# Altium PCB test.PcbDoc
Units mm, origin at the board's own origin, x right, y up, seen from the top; angles counter-clockwise.
Board outline 145 x 100 mm, 2 copper layers (Top Layer, Bottom Layer); 77 components, 97 nets, 327 pads, 0 vias.
Unrouted connection lines stored in the file: 180.
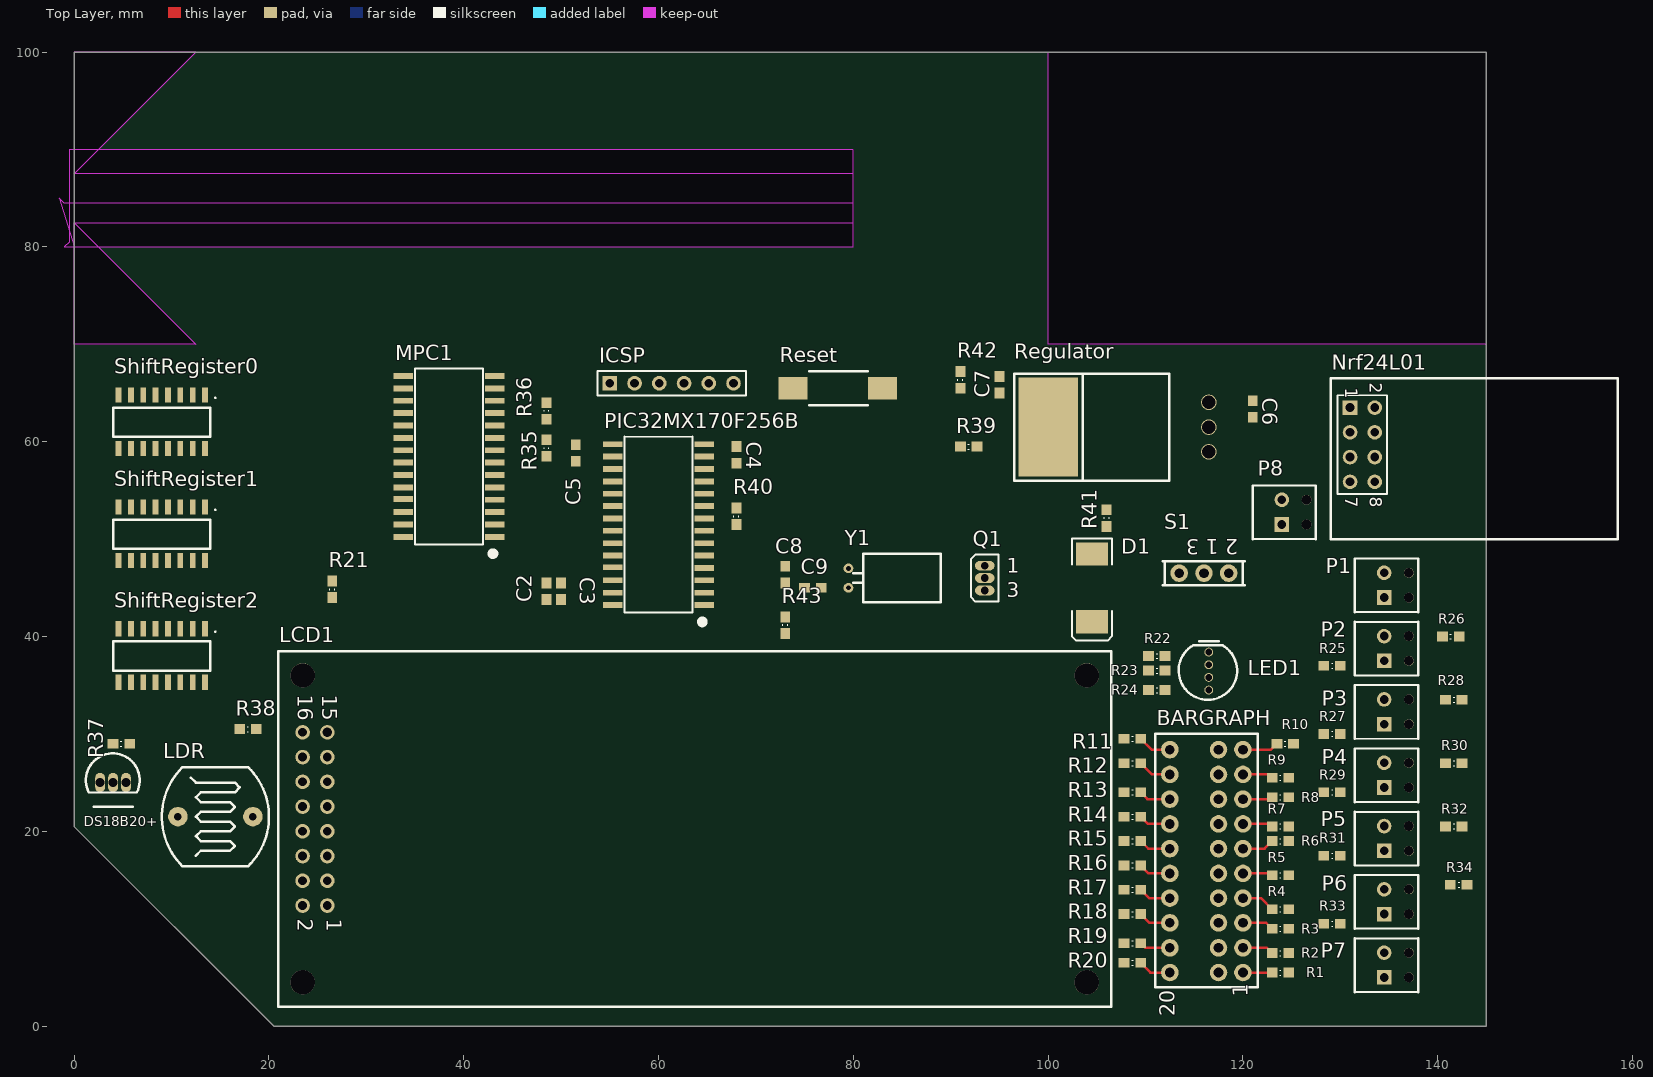
[diagram p0: Top Layer view]
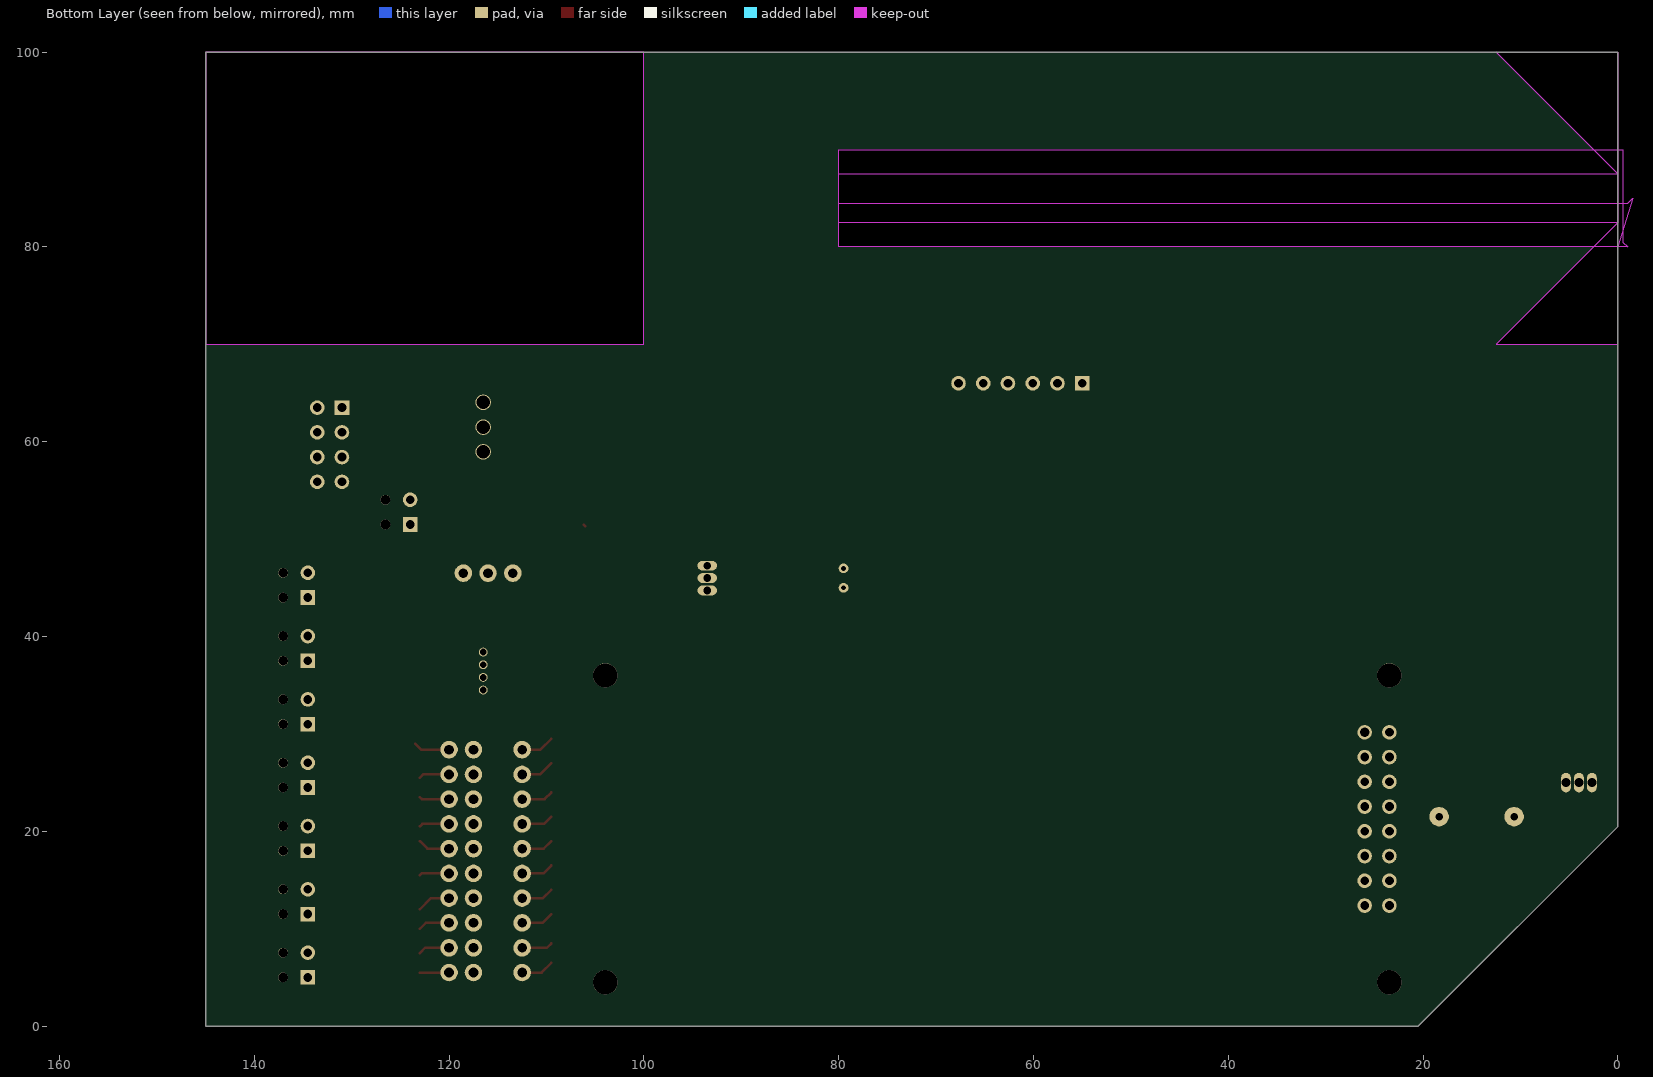
[diagram p1: Bottom Layer view, seen from below]

## Layer stack, top to bottom
Top Solder: solder mask 0.0102, Solder Resist, Dk 3.5
Top Layer: signal copper 0.0356
Dielectric 1: dielectric 0.32, FR-4, Dk 4.8
Bottom Layer: signal copper 0.0356
Bottom Solder: solder mask 0.0102, Solder Resist, Dk 3.5

## Board outline
20.5,0 145,0 145,100 0,100 0,20.5
cut-out: 80,80 80,90 -0.5,90 -0.5,80.5 -1,80
cut-out: 0,80 80,80 80,84.5 -1,84.5 -1.5,85
cut-out: 0,87.5 0,82.5 80,82.5 80,87.5
cut-out: 145,70 100,70 100,100 145,100
cut-out: 0,82.5 12.5,70 0,70
cut-out: 0,87.5 12.5,100 0,100

## Design rules (kind name [scope] priority, off if disabled: settings)
Clearance [All] p1: gap=0.2
PolygonConnect [All] p1: connectstyle=Relief reliefconductorwidth=0.254 reliefentries=4 polygonreliefangle="90 Angle" airgapwidth=0.254
RoutingVias [All] p1: holewidth=0.711 width=1.27 viastyle="Through Hole" minholewidth=0.711 minwidth=1.27 maxholewidth=0.711 maxwidth=1.27
SolderMaskExpansion [All] p1: expansion=0.102
UnpouredPolygon [All] p1: allowunpoured=FALSE
Width [All] p1: maxlimit=10 minlimit=0.2 preferedwidth=0.254
29 further rules are at their usual default settings.

## Classes and differential pairs
net class SPI[0..3]: SPI0 SPI1 SPI2 SPI3
net class RD[0..2]: RD0 RD1 RD2
net class LED[0..2]: LED0 LED1 LED2
net class LCD[0..10]: LCD0 LCD1 LCD2 LCD3 LCD4 LCD5 LCD6 LCD7 LCD8 LCD9 LCD10
net class I2C[0..1]: I2C0 I2C1
net class ELECTRODE[0..4]: ELECTRODE0 ELECTRODE1 ELECTRODE2 ELECTRODE3 ELECTRODE4
component class TempSensor: DS18B20+ R37
component class SoilMoisture: P7
component class Pump: P1 PUMP Q1 R43
component class Power: C6 C7 P8 R42 Regulator S1
component class PIC32MX170F256B: C2 C3 C4 C5 C8 C9 ICSP PIC32MX170F256B R39 R40 Reset Y1
component class ModRadio: Nrf24L01
component class MCP23017: MPC1 R35 R36
component class LumSensor: LDR R38
component class "Level Sensor": P2 P3 P4 P5 P6 R25 R26 R27 R28 R29 R30 R31 R32 R33 R34
component class LedAlert: LED1 R22 R23 R24
component class "Ecran LCD": LCD1 R21
component class BarGraph: BARGRAPH R1 R2 R3 R4 R5 R6 R7 R8 R9 R10 R11 R12 R13 R14 R15 R16 R17 R18 R19 R20 ShiftRegister0 ShiftRegister1 ShiftRegister2

## Components (designator, comment, footprint, x,y, rotation, side; value= is the part's Value field where it differs from the comment)
BARGRAPH "BargraphRG" BargraphRG 117.5,5.5 r90 top
C2 "0.1uF" C0603 48.5,45.5 r270 top
C3 "0.1uF" C0603 50,45.5 r270 top
C4 "0.1uF" C0603 68,59.5 r270 top
C5 "10uF" C0603 51.5,58 r90 top
C6 "10uF" C0603 121,62.5 r90 top
C7 "100nF" C0603 95,65 r90 top
C8 "15pF" C0603 73,45.5 r90 top
C9 "15pF" C0603 75,45 r0 top
D1 "Diode" SMC 104.5,45 r270 top
DS18B20+ "DS18B20+" DS18B20+ 4,25 r0 top
ICSP "Program/Debug" HDR1X6 55,66 r0 top
LCD1 "FC1602B04-FHYYBW-91LE" FC1602B04-FHYYBW-91LE 26,20 r270 top
LDR "NSL-4962" NSL-4962 14.5,21.5 r0 top
LED1 "LED_RGB" LED1 116.5,36.5 r90 top
MPC1 "MPC23017" MCP23017 38.5,56.5 r90 top
Nrf24L01 "Nrf24L01" NRF24L01 131,63.5 r270 top
P1 "Header Pompe" BORNIER 134.5,44 r90 top
P2 "Header 2" BORNIER 134.5,37.5 r90 top
P3 "Header 2" BORNIER 134.5,31 r90 top
P4 "Header 2" BORNIER 134.5,24.5 r90 top
P5 "Header 2" BORNIER 134.5,18 r90 top
P6 "Header 2" BORNIER 134.5,11.5 r90 top
P7 "Header Sensor" BORNIER 134.5,5 r90 top
P8 "Header BAT" BORNIER 124,51.5 r90 top
PIC32MX170F256B "PIC32MX170F256B" PIC32MX170F256B 60,49.5 r90 top
Q1 "IRFZ24N" E3 93.5,46 r0 top
R1 "220Ω" R0603 123,5.5 r0 top
R2 "220Ω" R0603 123,7.5 r0 top
R3 "220Ω" R0603 123,10 r0 top
R4 "220Ω" R0603 123,12 r0 top
R5 "220Ω" R0603 123,15.5 r0 top
R6 "220Ω" R0603 123,19 r0 top
R7 "220Ω" R0603 123,20.5 r0 top
R8 "220Ω" R0603 123,23.5 r0 top
R9 "220Ω" R0603 123,25.5 r0 top
R10 "220Ω" R0603 123.5,29 r0 top
R11 "160Ω" R0603 109.5,29.5 r180 top
R12 "160Ω" R0603 109.5,27 r180 top
R13 "160Ω" R0603 109.5,24 r180 top
R14 "160Ω" R0603 109.5,21.5 r180 top
R15 "160Ω" R0603 109.5,19 r180 top
R16 "160Ω" R0603 109.5,16.5 r180 top
R17 "160Ω" R0603 109.5,14 r180 top
R18 "160Ω" R0603 109.5,11.5 r180 top
R19 "160Ω" R0603 109.5,8.5 r180 top
R20 "160Ω" R0603 109.5,6.5 r180 top
R21 "600Ω" R0603 26.5,44 r90 top
R22 "140Ω" R0603 112,38 r180 top
R23 "20Ω" R0603 112,36.5 r180 top
R24 "30Ω" R0603 112,34.5 r180 top
R25 "1KΩ" R0603 130,37 r180 top
R26 "10MΩ" R0603 140.5,40 r0 top
R27 "1KΩ" R0603 130,30 r180 top
R28 "10MΩ" R0603 142.5,33.5 r180 top
R29 "1KΩ" R0603 130,24 r180 top
R30 "10MΩ" R0603 142.5,27 r180 top
R31 "1KΩ" R0603 130,17.5 r180 top
R32 "10MΩ" R0603 142.5,20.5 r180 top
R33 "1KΩ" R0603 130,10.5 r180 top
R34 "10MΩ" R0603 143,14.5 r180 top
R35 "4.7KΩ" R0603 48.5,58.5 r90 top
R36 "4.7KΩ" R0603 48.5,64 r270 top
R37 "4.7K" R0603 4,29 r0 top
R38 "Res1" R0603 17,30.5 r0 top
R39 "10K" R0603 91,59.5 r0 top
R40 "1K" R0603 68,51.5 r90 top
R41 "2M" R0603 106,53 r270 top
R42 "1M" R0603 91,65.5 r90 top
R43 "10K" R0603 73,42 r270 top
Regulator "LM1117D-33" VOLTREG3.3V 116.5,61.5 r90 top
Reset "SW-PB" Reset 83,65.5 r180 top
S1 "SW-On/Off" "Switch on/off" 116,46.5 r180 top
ShiftRegister0 "74HC595" SN74HC595D 9,62 r180 top
ShiftRegister1 "74HC595" SN74HC595D 9,50.5 r180 top
ShiftRegister2 "74HC595" SN74HC595D 9,38 r180 top
Y1 "32.768kHz" XTAL 79.5,46 r270 top

## Footprints (in the part's own frame and the unit in brackets; to place one, negate y for a bottom-side part, rotate by r counter-clockwise, add the part's x,y. Pads: shape width x height; smd on the part's side, far side on the other; paste and mask are expansions set on the pad)
BargraphRG [mm]
  round 1.8 hole 1: 1(0,-2.5) 2(2.54,-2.5) 3(5.1,-2.5) 4(7.64,-2.5) 5(10.18,-2.5) 6(12.72,-2.5) 7(15.26,-2.5) 8(17.8,-2.5) 9(20.34,-2.5) 10(22.88,-2.5) 11(22.88,5) 12(20.34,5) 13(17.8,5) 14(15.26,5) 15(12.72,5) 16(10.18,5) 17(7.64,5) 18(5.1,5) 19(2.54,5) 20(0,5) 21(0,0) 22(2.54,0) 23(5.1,0) 24(7.64,0) 25(10.18,0) 26(12.72,0) 27(15.26,0) 28(17.8,0) 29(20.34,0) 30(22.88,0)
  silkscreen extent -1.5,-4 24.5,6.5
BORNIER [mm]
  rect 1.5x1.5 hole 0.9: 1(0,0)
  round 1.5 hole 0.9: 2(2.54,0)
  round 1 hole 1: NC(0,-2.54) NC(2.54,-2.54)
  silkscreen extent -1.5,-3.5 4,3
C0603 [mm]
  rect 1.1x1 smd: 1(0,0) 2(1.7,0)
DS18B20+ [mm] "DS18B20+"
  oval 1x2 hole 0.9: 1(-1.33,0) 2(0,0) 3(1.33,0)
  silkscreen extent -2.79,-2.5 2.74,3
E3 [mm] "TO, Flat Index; 3 In-Line, Axial Leads; Body Dia. 4.6mm; Lead Dia. 0.5 mm (max)"
  oval 2x1 hole 0.8: 1(0,1.27) 2(0,0) 3(0,-1.27)
  silkscreen extent -1.41,-2.41 1.41,2.41
FC1602B04-FHYYBW-91LE [mm] "LCD"
  round 1.5 hole 0.9: 1(7.62,0) 2(7.62,-2.54) 3(5.08,0) 4(5.08,-2.54) 5(2.54,0) 6(2.54,-2.54) 7(0,0) 8(0,-2.54) 9(-2.54,0) 10(-2.54,-2.54) 11(-5.08,0) 12(-5.08,-2.54) 13(-7.62,0) 14(-7.62,-2.54) 16(-10.16,-2.54)
  round 1.5 hole 1: 15(-10.16,0)
  round 2.5 hole 2.5: NC(-16,77.96) NC(-16,-2.54) NC(15.5,77.96) NC(15.5,-2.54)
  silkscreen extent -18.5,-5.04 18,80.46
HDR1X6 [mm] "Connector; Header; 6 Position"
  rect 1.5x1.5 hole 0.9: 1(0,0)
  round 1.5 hole 0.9: 2(2.54,0) 3(5.08,0) 4(7.62,0) 5(10.16,0) 6(12.7,0)
  silkscreen extent -1.27,-1.27 13.97,1.27
LED1 [mm] "LedRGB"
  round 0.9 hole 0.7: 1(1.9,0) 2(0.6,0) 3(-0.7,0) 4(-2,0)
  silkscreen extent -3,-2.9 3,3.1
MCP23017 [mm]
  rect 0.6x2 smd: 1(-6.27,-4.7) 2(-5,-4.7) 3(-3.73,-4.7) 4(-2.46,-4.7) 5(-1.19,-4.7) 6(0.08,-4.7) 7(1.35,-4.7) 8(2.62,-4.7) 9(3.89,-4.7) 10(5.16,-4.7) 11(6.43,-4.7) 12(7.7,-4.7) 13(8.97,-4.7) 14(10.24,-4.7) 15(10.24,4.7) 16(8.97,4.7) 17(7.7,4.7) 18(6.43,4.7) 19(5.16,4.7) 20(3.89,4.7) 21(2.62,4.7) 22(1.35,4.7) 23(0.08,4.7) 24(-1.19,4.7) 25(-2.39,4.7) 26(-3.73,4.7) 27(-5,4.7) 28(-6.27,4.7)
  silkscreen extent -8.05,-4.55 11.01,3.5
NRF24L01 [mm]
  rect 1.5x1.5 hole 0.9: 1(0,0)
  round 1.5 hole 0.9: 2(0,2.54) 3(2.54,0) 4(2.54,2.54) 5(5.08,0) 6(5.08,2.54) 7(7.62,0) 8(7.62,2.54)
  silkscreen extent -3,-2 13.5,27.5
NSL-4962 [mm]
  round 2 hole 0.8: 1(-3.85,0) 2(3.85,0)
  silkscreen extent -5.5,-5.1 5.5,5.1
PIC32MX170F256B [mm]
  rect 0.6x2 smd: 1(-6.27,-4.7) 2(-5,-4.7) 3(-3.73,-4.7) 4(-2.46,-4.7) 5(-1.19,-4.7) 6(0.08,-4.7) 7(1.35,-4.7) 8(2.62,-4.7) 9(3.89,-4.7) 10(5.16,-4.7) 11(6.43,-4.7) 12(7.7,-4.7) 13(8.97,-4.7) 14(10.24,-4.7) 15(10.24,4.7) 16(8.97,4.7) 17(7.7,4.7) 18(6.43,4.7) 19(5.16,4.7) 20(3.89,4.7) 21(2.62,4.7) 22(1.35,4.7) 23(0.08,4.7) 24(-1.19,4.7) 25(-2.39,4.7) 26(-3.73,4.7) 27(-5,4.7) 28(-6.27,4.7)
  silkscreen extent -8.05,-4.55 11.01,3.5
R0603 [mm]
  rect 1.1x1 smd: 1(0,0) 2(1.7,0)
  silkscreen extent 0.76,-0.25 0.89,0.25
Reset [mm]
  rect 3x2.3 smd: 1(0,0) 2(9.2,0)
  silkscreen extent 1.5,-1.75 7.5,1.75
SMC [mm] "DO-214-AB/SMC; 2 C-Bend Leads; Body 7.9 x 5.9 mm, inc. leads (LxW)"
  rect 2.4x3.3 smd: 1(-3.475,0) 2(3.475,0)
  silkscreen extent -5.07,-2.05 5.43,2.05
SN74HC595D [mm]
  rect 0.6x1.55 smd: 1(-4.445,-2.8) 2(-3.175,-2.8) 3(-1.905,-2.8) 4(-0.635,-2.8) 5(0.635,-2.8) 6(1.905,-2.8) 7(3.175,-2.8) 8(4.445,-2.8) 9(4.445,2.7) 10(3.175,2.7) 11(1.905,2.7) 12(0.635,2.7) 13(-0.635,2.7) 14(-1.905,2.7) 15(-3.175,2.7) 16(-4.445,2.7)
  silkscreen extent -5.51,-2.5 5,1.5
"Switch on/off" [mm]
  round 1.8 hole 1: 1(0,0) 2(-2.54,0) 3(2.54,0)
  silkscreen extent -4.21,-1.25 4.21,1.25
VOLTREG3.3V [mm]
  round 1.6 hole 1.4: 1(-2.54,0) 2(0,0) 3(2.54,0)
  rect 10.16x6.1 smd: 4(0,16.5)
  silkscreen extent -5.5,4.06 5.5,20
XTAL [mm]
  round 1 hole 0.5: 1(-1,0) 2(1,0)
  silkscreen extent -2.5,0.5 2.5,9.5

## Part data
C2 C3 C4 C5 C6 C7 C8 C9: library part Cap, "Capacitor"
D1: "Default Diode"
ICSP: library part "Header 6", "Header, 6-Pin"
Nrf24L01: library part "Header 4X2", "Header, 4-Pin, Dual row"
P1 P7 P8: library part "Header 2", "Header, 2-Pin"
P2 P3 P4 P5 P6: "Header, 2-Pin"
Q1: library part MOSFET-N, "N-Channel MOSFET"
R1 R2 R3 R4 R5 R6 R7 R8 R9 R10 R11 R12 R13 R14 R15 R16 R17 R18 R19 R20 R21 R22 R23 R24 R25 R26 R27 R28 R29 R30 R31 R32 R33 R34 R35 R36 R37 R39 R40 R41 R42 R43: library part Res1, "Resistor"
R38: "Resistor"
Reset: "Switch"
S1: library part SW-SPDT, "SPDT Subminiature Toggle Switch, Right Angle Mounting, Vertical Actuation"
Y1: library part XTAL, "Crystal Oscillator"

## Nets (pads, with @x,y where several pads share a name; then routed paths per layer and width w, separated by ;. In a path a pad name is that pad's centre, name@x,y a point inside that pad or via, vN(x,y) a via of type N, cw(c..) or ccw(c..) an arc to the next point about the centre after c; other vN are vias at no path point)
3.3V: C2.2 C3.2 C7.2 DS18B20+.3 ICSP.2 LCD1.2 LCD1.5 LCD1.15 LDR.1 MPC1.9 MPC1.18 Nrf24L01.2 P2.1 P3.1 P4.1 P5.1 P6.1 PIC32MX170F256B.13 PIC32MX170F256B.28 R35.2 R36.2 R37.2 R39.2 Regulator.2 Regulator.4 ShiftRegister0.10 ShiftRegister0.16 ShiftRegister1.10 ShiftRegister1.16 ShiftRegister2.10 ShiftRegister2.16
6V: 
7.4V: D1.2 P1.1 P8.1 S1.2
"BAT. LVL.": ICSP.5 PIC32MX170F256B.5 R41.1 R42.2
CE: Nrf24L01.3 PIC32MX170F256B.15
ELECTRODE0: MPC1.21 R25.2
ELECTRODE1: MPC1.22 R27.2
ELECTRODE2: MPC1.23 R29.2
ELECTRODE3: MPC1.24 R31.2
ELECTRODE4: MPC1.25 R33.2
GND: BARGRAPH.21 BARGRAPH.22 BARGRAPH.23 BARGRAPH.24 BARGRAPH.25 BARGRAPH.26 BARGRAPH.27 BARGRAPH.28 BARGRAPH.29 BARGRAPH.30 C2.1 C3.1 C4.1 C5.2 C6.1 C7.1 C8.1 C9.1 DS18B20+.1 ICSP.3 LCD1.1 LED1.2 MPC1.10 MPC1.15 MPC1.16 MPC1.17 Nrf24L01.1 P7.2 P8.2 PIC32MX170F256B.8 PIC32MX170F256B.19 PIC32MX170F256B.27 Q1.3 R26.1 R28.1 R30.1 R32.1 R34.1 R38.2 R42.1 R43.2 Regulator.1 Reset.2 S1.3 ShiftRegister0.8 ShiftRegister0.13 ShiftRegister1.8 ShiftRegister1.13 ShiftRegister2.8 ShiftRegister2.13
I2C0: MPC1.12 PIC32MX170F256B.18 R35.1
I2C1: MPC1.13 PIC32MX170F256B.17 R36.1
LCD0: LCD1.7 MPC1.1
LCD1: LCD1.8 MPC1.2
LCD2: LCD1.9 MPC1.3
LCD3: LCD1.10 MPC1.4
LCD4: LCD1.11 MPC1.5
LCD5: LCD1.12 MPC1.6
LCD6: LCD1.13 MPC1.7
LCD7: LCD1.14 MPC1.8
LCD8: LCD1.4 MPC1.26
LCD9: LCD1.6 MPC1.27
LCD10: MPC1.28 R21.2
LED0: PIC32MX170F256B.6 R22.2
LED1: PIC32MX170F256B.14 R23.2
LED2: PIC32MX170F256B.7 R24.2
LUM: LDR.2 PIC32MX170F256B.2 R38.1
MCLR: ICSP.1 PIC32MX170F256B.1 R40.2
MOISTSENSOR: P7.1 PIC32MX170F256B.23
NetBARGRAPH_1: BARGRAPH.1 R1.1 | length 3
  Top Layer w0.254: BARGRAPH.1 R1.1
NetBARGRAPH_2: BARGRAPH.2 R2.1 | length 3.2
  Top Layer w0.254: BARGRAPH.2 122.46,8.04 R2.1
NetBARGRAPH_3: BARGRAPH.3 R3.1 | length 3.2
  Top Layer w0.254: BARGRAPH.3 122.4,10.6 R3.1
NetBARGRAPH_4: BARGRAPH.4 R4.1 | length 3.5
  Top Layer w0.254: BARGRAPH.4 121.86,13.14 R4.1
NetBARGRAPH_5: BARGRAPH.5 R5.1 | length 3.1
  Top Layer w0.254: BARGRAPH.5 122.82,15.68 R5.1
NetBARGRAPH_6: BARGRAPH.6 R6.1 | length 3.3
  Top Layer w0.254: BARGRAPH.6 122.22,18.22 R6.1
NetBARGRAPH_7: BARGRAPH.7 R7.1 | length 3.1
  Top Layer w0.254: BARGRAPH.7 122.74,20.76 R7.1
NetBARGRAPH_8: BARGRAPH.8 R8.1 | length 3.1
  Top Layer w0.254: BARGRAPH.8 122.8,23.3 R8.1
NetBARGRAPH_9: BARGRAPH.9 R9.1 | length 3.1
  Top Layer w0.254: BARGRAPH.9 122.66,25.84 R9.1
NetBARGRAPH_10: BARGRAPH.10 R10.1 | length 3.8
  Top Layer w0.254: BARGRAPH.10 122.88,28.38 R10.1
NetBARGRAPH_11: BARGRAPH.11 R11.1 | length 3.5
  Top Layer w0.254: R11.1 110.62,28.38 BARGRAPH.11
NetBARGRAPH_12: BARGRAPH.12 R12.1 | length 3.5
  Top Layer w0.254: R12.1 110.66,25.84 BARGRAPH.12
NetBARGRAPH_13: BARGRAPH.13 R13.1 | length 3.3
  Top Layer w0.254: R13.1 110.2,23.3 BARGRAPH.13
NetBARGRAPH_14: BARGRAPH.14 R14.1 | length 3.3
  Top Layer w0.254: R14.1 110.24,20.76 BARGRAPH.14
NetBARGRAPH_15: BARGRAPH.15 R15.1 | length 3.3
  Top Layer w0.254: R15.1 110.28,18.22 BARGRAPH.15
NetBARGRAPH_16: BARGRAPH.16 R16.1 | length 3.3
  Top Layer w0.254: R16.1 110.32,15.68 BARGRAPH.16
NetBARGRAPH_17: BARGRAPH.17 R17.1 | length 3.4
  Top Layer w0.254: R17.1 110.36,13.14 BARGRAPH.17
NetBARGRAPH_18: BARGRAPH.18 R18.1 | length 3.4
  Top Layer w0.254: R18.1 110.4,10.6 BARGRAPH.18
NetBARGRAPH_19: BARGRAPH.19 R19.1 | length 3.2
  Top Layer w0.254: R19.1 109.96,8.04 BARGRAPH.19
NetBARGRAPH_20: BARGRAPH.20 R20.1 | length 3.4
  Top Layer w0.254: R20.1 110.5,5.5 BARGRAPH.20
NetC4_2: C4.2 R39.1 R40.1 Reset.1
NetC5_1: C5.1 PIC32MX170F256B.20
NetC6_2: C6.2 R41.2 Regulator.3 S1.1 | length 0.5
  Top Layer w0.254: R41.2 R41.2@106.2,51.5 ; Regulator.3 Regulator.3@116.66,64.2
NetD1_1: D1.1 P1.2 Q1.1
NetLCD1_16: LCD1.16 R21.1
NetLED1_1: LED1.1 R22.1
NetLED1_3: LED1.3 R23.1
NetLED1_4: LED1.4 R24.1
NetNrf24L01_8: Nrf24L01.8 PIC32MX170F256B.16
NetP2_2: P2.2 R25.1 R26.2
NetP3_2: P3.2 R27.1 R28.2
NetP4_2: P4.2 R29.1 R30.2
NetP5_2: P5.2 R31.1 R32.2
NetP6_2: P6.2 R33.1 R34.2
NetR1_2: R1.2 ShiftRegister0.15
NetR2_2: R2.2 ShiftRegister0.1
NetR3_2: R3.2 ShiftRegister0.2
NetR4_2: R4.2 ShiftRegister0.3
NetR5_2: R5.2 ShiftRegister0.4
NetR6_2: R6.2 ShiftRegister0.5
NetR7_2: R7.2 ShiftRegister0.6
NetR8_2: R8.2 ShiftRegister0.7
NetR9_2: R9.2 ShiftRegister1.15
NetR10_2: R10.2 ShiftRegister1.1
NetR11_2: R11.2 ShiftRegister1.2
NetR12_2: R12.2 ShiftRegister1.3
NetR13_2: R13.2 ShiftRegister1.4
NetR14_2: R14.2 ShiftRegister1.5
NetR15_2: R15.2 ShiftRegister1.6
NetR16_2: R16.2 ShiftRegister1.7
NetR17_2: R17.2 ShiftRegister2.15
NetR18_2: R18.2 ShiftRegister2.1
NetR19_2: R19.2 ShiftRegister2.2
NetR20_2: R20.2 ShiftRegister2.3
NetShiftRegister0_9: ShiftRegister0.9 ShiftRegister1.14
NetShiftRegister1_9: ShiftRegister1.9 ShiftRegister2.14
PUMP: ICSP.4 PIC32MX170F256B.4 Q1.2 R43.1
RD0: PIC32MX170F256B.3 ShiftRegister0.14
RD1: PIC32MX170F256B.10 ShiftRegister0.12 ShiftRegister1.12 ShiftRegister2.12
RD2: PIC32MX170F256B.9 ShiftRegister0.11 ShiftRegister1.11 ShiftRegister2.11
SOSCI: C9.2 PIC32MX170F256B.11 Y1.2
SOSCO: C8.2 PIC32MX170F256B.12 Y1.1
SPI0: Nrf24L01.7 PIC32MX170F256B.22
SPI1: Nrf24L01.6 PIC32MX170F256B.24
SPI2: Nrf24L01.5 PIC32MX170F256B.25
SPI3: Nrf24L01.4 PIC32MX170F256B.26
TEMP: DS18B20+.2 PIC32MX170F256B.21 R37.1
pads on no net: ICSP.6 LCD1.3 LCD1.NC MPC1.11 MPC1.14 MPC1.19 MPC1.20 P1.NC P2.NC P3.NC P4.NC P5.NC P6.NC P7.NC P8.NC ShiftRegister2.4 ShiftRegister2.5 ShiftRegister2.6 ShiftRegister2.7 ShiftRegister2.9

## Text inside footprints (layer, text, board x,y; h text height)
BARGRAPH: Top Overlay "1" at 120.5,3 h1.52 r90; Top Overlay "20" at 113,1 h1.52 r90
LCD1: Top Overlay "16" at 22.96,34 h1.52 r270; Top Overlay "15" at 25.46,34 h1.52 r270; Top Overlay "2" at 22.96,11 h1.52 r270; Top Overlay "1" at 25.96,11 h1.52 r270
Nrf24L01: Top Overlay "8" at 133.032,54.356 h1.27 r270; Top Overlay "7" at 130.492,54.356 h1.27 r270; Top Overlay "1" at 130.492,65.532 h1.27 r270; Top Overlay "2" at 133.032,66.04 h1.27 r270
Q1: Top Overlay "1" at 95.775,46.555 h1.5; Top Overlay "3" at 95.775,44.037 h1.5
S1: Top Overlay "2 1 3" at 119.5,50 h1.52 r180